# Altium PCB WiFi_Module-2-Layers.PcbDoc (part 2 of 2)
Units mil, origin at the board's own origin, x right, y up, seen from the top; angles counter-clockwise.
Board outline 2293.35 x 2499.67 mil, 2 copper layers (Top Layer, Bottom Layer); 66 components, 71 nets, 200 pads, 103 vias.
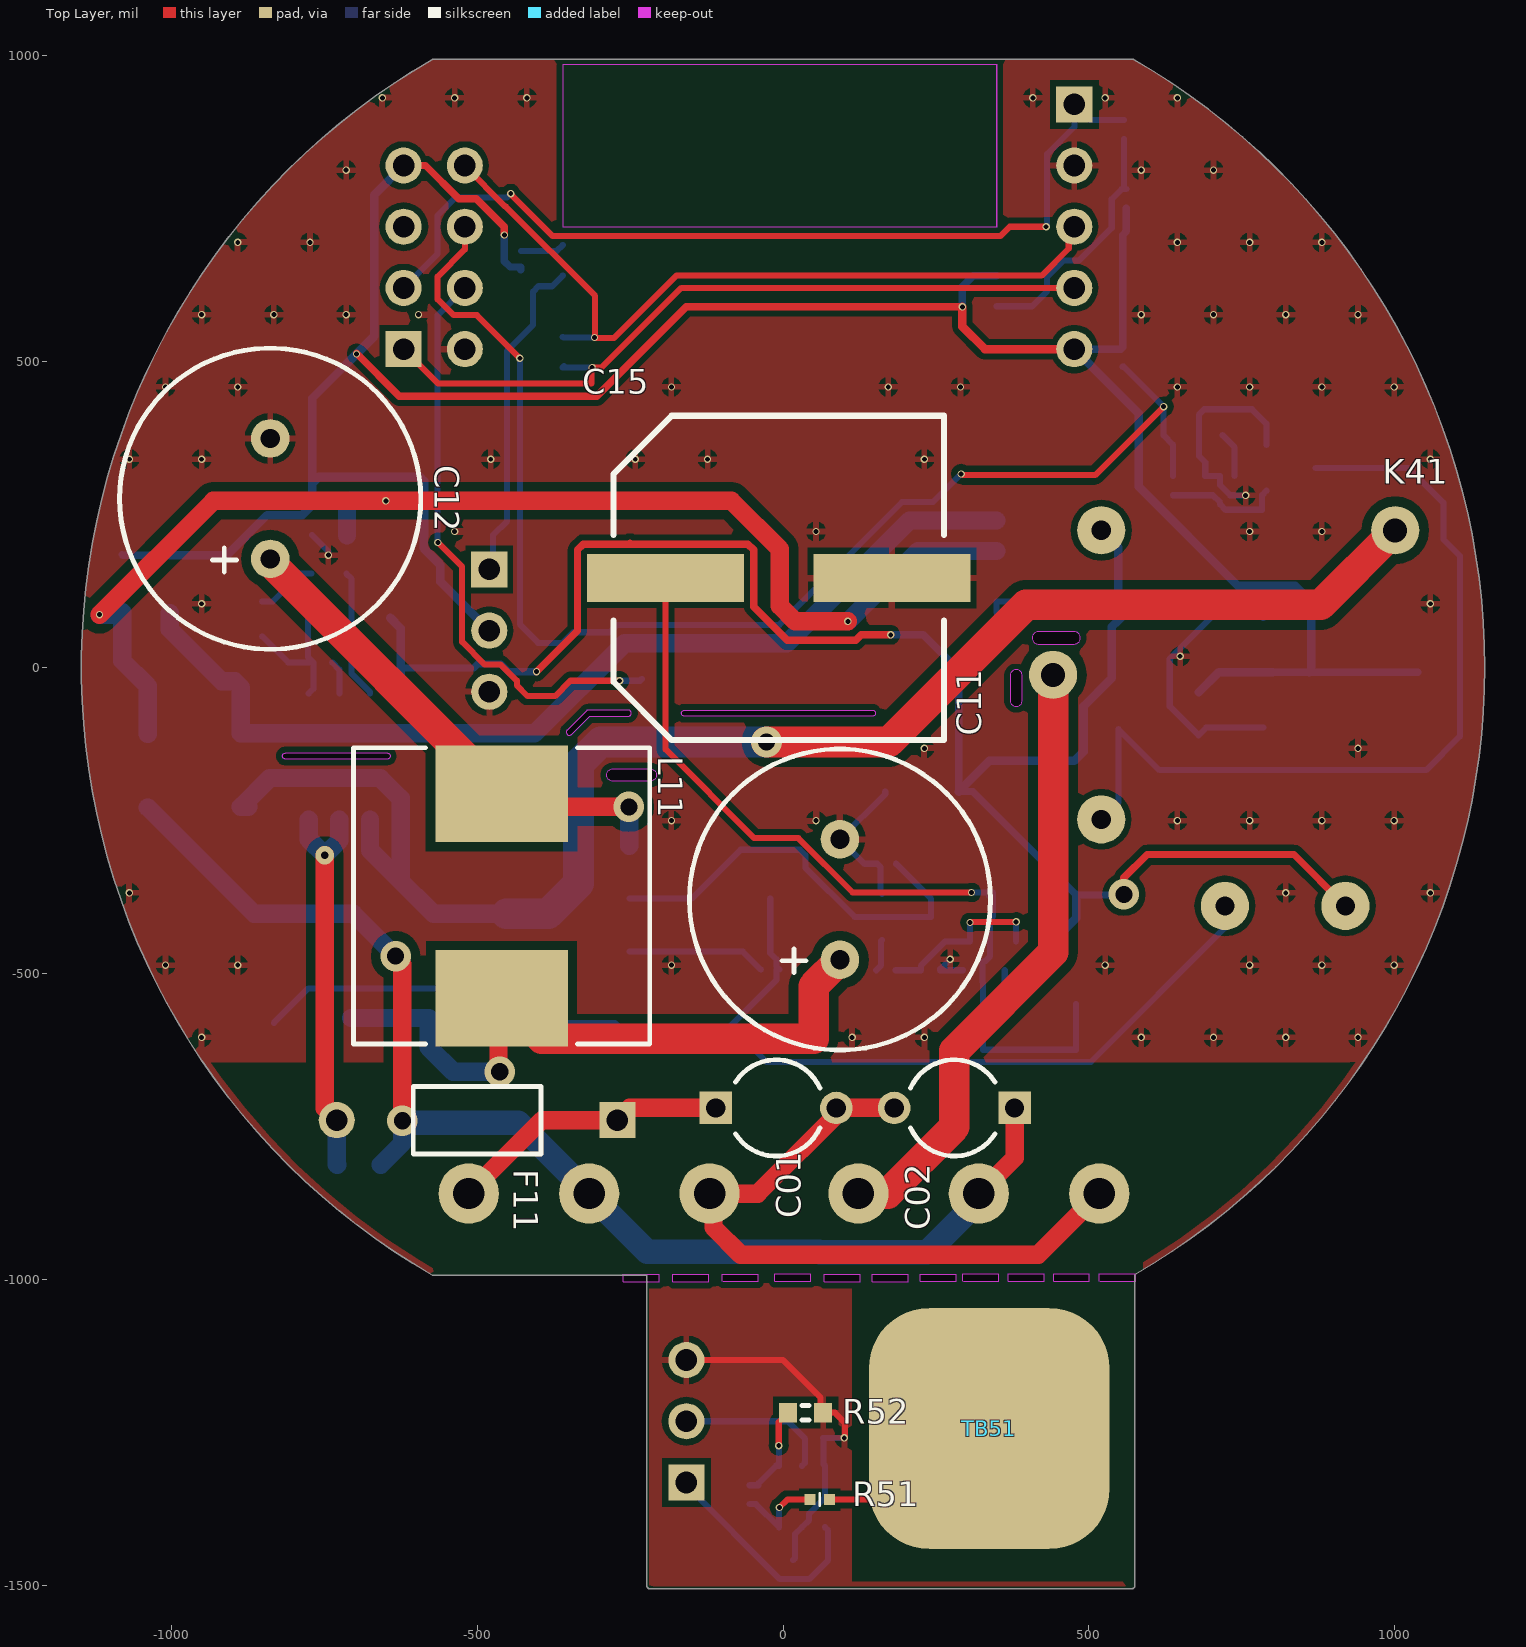
[diagram p0: Top Layer view]

## Via types
v1: diameter 12, hole 8, Top Layer to Bottom Layer, 96 vias
v2: diameter 50, hole 28, Top Layer to Bottom Layer, 6 vias
v3: diameter 30, hole 12, Top Layer to Bottom Layer, 1 vias

## Nets (pads, with @x,y where several pads share a name; then routed paths per layer and width w, separated by ;. In a path a pad name is that pad's centre, name@x,y a point inside that pad or via, vN(x,y) a via of type N, cw(c..) or ccw(c..) an arc to the next point about the centre after c; other vN are vias at no path point) (continued)
NetR53_2: (continued)
  Bottom Layer w10: P01.1 -158,-1337 -5,-1490 42.54,-1490 R53.2 73.54,-1410.34 U51.1
NetU12_4: 
NetU21_4: U21.4
NetU21_5: U21.5
NetU21_6: U21.6
NetU21_7: U21.7
NetU21_8: U21.8
NetU21_9: U21.9
NetU21_12: U21.12
NetU21_14: U21.14
NetU21_16: U21.16
NetU21_17: U21.17
NetU21_18: U21.18
NetU21_19: U21.19
NetU21_20: U21.20
NetU21_21: U21.21
NetU21_22: U21.22
NetU21_23: U21.23
NetU21_26: U21.26
NetU21_27: U21.27
NetU21_28: U21.28
NetU21_29: U21.29
NetU21_30: U21.30
NetU21_31: U21.31
NetU21_33: U21.33
NetU21_36: U21.36
RST: P22.5
RX: P21.4 P22.1 U21.34 | length 1248.1
  Top Layer w10: P22.1 -564,464 -313,464 -313,489 v1(-312,490) -296,490 -166,620 P21.4
  Bottom Layer w10: U21.34 -358,492 -356,490 v1(-312,490)
TouchBtn: P23.1 U21.37 | length 542.8
  Bottom Layer w10: P23.1 -474,166 -474,216 -451,239 -451,517 -408.46,559.54 -408.46,613.93 -399.68,622.72 -377.28,622.72 U21.37
TX: P21.3 P22.8 U21.35 | length 1297
  Top Layer w10: P22.8 -520,819.3 -453.7,753 -453,753 -307,607 -307,538 -276.28,538 -174.28,640 422.57,640 467,684.43 467,711 P21.3
  Bottom Layer w10: U21.35 -359,539 v1(-308,539)
pads on no net: U21.32

## Polygon pours and split planes (outlines as drawn)
GND on Bottom Layer "NONET_L-01_P-001" (solid, remove dead copper, pour order 22): -935.99,-645.01 ccw(c0,0) -568.36,-984.43 cw(c-570.87,-988.77) -565.85,-988.77 cw(c-570.87,-988.77) -573.37,-993.11 cw(c0,0) -948.26,-644.85 cw(c-947,-640) -951.97,-639.36 cw(c0,0) -573.37,993.11 cw(c-570.87,988.77) -570.87,993.78 570.87,993.78 cw(c570.87,988.77) 573.37,993.11 cw(c0,0) 1146.75,0 cw(c0,0) 953.29,-637.4 cw(c949,-640) 954.02,-640 cw(c949,-640) 949,-645.01 948.15,-645.01 cw(c0,0) 573.37,-993.11 cw(c570.87,-988.77) 568.36,-984.43 ccw(c0,0) 935.99,-645.01
no net on Bottom Layer "NONET_L-01_P-001" (solid, remove dead copper, pour order 8): 559,989
no net on Bottom Layer "NONET_L-01_P-001" (solid, remove dead copper, pour order 6): 1499,913
GND1 on Bottom Layer "NONET_L-01_P-001" (solid, remove dead copper, pour order 0): 570,-994 570,-1499 -218,-1499 -217,-1498 -217,-990 566,-990
GND on Top Layer "NONET_L-01_P-001" (solid, remove dead copper, pour order 24): -935.99,-645.01 ccw(c0,0) -568.36,-984.43 cw(c-570.87,-988.77) -565.85,-988.77 cw(c-570.87,-988.77) -573.37,-993.11 cw(c0,0) -948.26,-644.85 cw(c-947,-640) -951.97,-639.36 cw(c0,0) -573.37,993.11 cw(c-570.87,988.77) -570.87,993.78 570.87,993.78 cw(c570.87,988.77) 573.37,993.11 cw(c0,0) 1146.75,0 cw(c0,0) 953.29,-637.4 cw(c949,-640) 954.02,-640 cw(c949,-640) 949,-645.01 948.15,-645.01 cw(c0,0) 573.37,-993.11 cw(c570.87,-988.77) 568.36,-984.43 ccw(c0,0) 935.99,-645.01
GND1 on Top Layer "NONET_L-01_P-001" (solid, remove dead copper, pour order 4): 570,-991 568,-993 568,-1502 -219,-1502 -220,-1501 -219,-1500 -219,-989 570,-989
no net on Bottom Solder "NONET_L-01_P-001" (solid, remove dead copper): 570.87,988.77
no net on Bottom Solder "NONET_L-01_P-001" (none, remove dead copper): -573.37,-993.11 ccw(c-570.87,-988.77) -570.87,-993.78 -219.79,-993.78 ccw(c-217.54,-989.3) -217.54,-994.32 569.62,-994.32 ccw(c569.62,-989.3) 572.2,-993.6 ccw(c570.87,-988.77) 573.37,-993.11 ccw(c0,0) 1146.75,0 ccw(c0,0) 573.37,993.11 ccw(c570.87,988.77) 570.87,993.78 -570.87,993.78 ccw(c-570.87,988.77) -573.37,993.11 ccw(c0,0)

## Silkscreen, mask and mechanical layers (free items; w line width, h text height)
Bottom Overlay:
  text "UP" at 272,-1343 h100 r270
Bottom Solder:
  lines w10: -947,-640 949,-640 ; 569.62,-989.3 -217.54,-989.3 ; 569.87,-989.06 569.87,-1500.87 -217.54,-1500.87 -217.54,-989.3 ; 570.87,-988.77 ccw(c0,0) 570.87,988.77 -570.87,988.77 ccw(c0,0) -570.87,-988.77 -218.07,-988.77 -217.54,-989.3
Mechanical 17:
  lines w10: -813,-145 -647,-145 ; -349.16,-106 -318.16,-75 -253,-75 ; -161,-75 146,-75 ; 196,-901 196,-887.55
  lines w20: -278,-176 -217,-176 ; 381,-54 381,-14 ; 417,48 476,48

## Text inside footprints (layer, text, board x,y; h text height)
C11: Mechanical 17 "d" at 113,-649.57 h60 r90; Mechanical 19 "-" at 113,-649.57 h60 r90
C12: Mechanical 17 "d" at -818,5.57 h60 r90; Mechanical 19 "-" at -818,5.57 h60 r90
C13: Mechanical 17 "d" at 198.33,-323 h5.12; Mechanical 19 "-" at 198.33,-323 h5.12
C14: Mechanical 17 "d" at -49.84,-492 h5.12 r180; Mechanical 19 "-" at -49.84,-492 h5.12 r180
C15: Mechanical 17 "d" at -37,111 h60; Mechanical 19 "-" at -37,111 h60
C16: Mechanical 17 "d" at 287,-193 h20; Mechanical 19 "-" at 287,-233 h20
C17: Mechanical 17 "d" at 405,-536 h5.12; Mechanical 19 "-" at 405,-536 h5.12
C18: Mechanical 17 "d" at 702,126 h5.12 r90; Mechanical 19 "-" at 702,126 h5.12 r90
C19: Mechanical 17 "d" at 684,-31 h15 r90; Mechanical 19 "-" at 684,-31 h15 r90
C21: Mechanical 17 "d" at -430.35,636 h5.12 r270; Mechanical 19 "-" at -430.35,636 h5.12 r270
C22: Mechanical 17 "d" at 559,908 h5.12 r90; Mechanical 19 "-" at 559,908 h5.12 r90
C31: Mechanical 17 "d" at -621,76.65 h15; Mechanical 19 "-" at -621,76.65 h15
C32: Mechanical 17 "d" at -723,6 h5.12; Mechanical 19 "-" at -723,6 h5.12
C51: Mechanical 17 "d" at -57,-1381 h5.12 r270; Mechanical 19 "-" at -57,-1381 h5.12 r270
C52: Mechanical 17 "d" at 22,-1258 h5.12 r180; Mechanical 19 "-" at 22,-1258 h5.12 r180
D11: Mechanical 17 "d" at -619,-589 h15 r270; Mechanical 19 "-" at -619,-589 h15 r270
D12: Mechanical 17 "d" at -745.71,-589 h15 r270; Mechanical 19 "-" at -745.71,-589 h15 r270
D13: Mechanical 17 "d" at -412,-387 h15 r90; Mechanical 19 "-" at -412,-387 h15 r90
D14: Mechanical 17 "d" at -792,-387 h15 r90; Mechanical 19 "-" at -792,-387 h15 r90
D15: Mechanical 17 "d" at -76,-626 h15; Mechanical 19 "-" at -76,-626 h15
D16: Mechanical 17 "d" at 393,-413 h20; Mechanical 19 "-" at 393,-413 h20
D17: Mechanical 17 "d" at 439,-566 h15 r270; Mechanical 19 "-" at 439,-566 h15 r270
D21: Mechanical 17 "d" at 705,374.25 h10; Mechanical 19 "-" at 705,374.25 h10
D31: Mechanical 17 "d" at -1017,106 h10 r270; Mechanical 19 "-" at -1017,106 h10 r270
D32: Mechanical 17 "d" at -1095,107 h10 r270; Mechanical 19 "-" at -1095,107 h10 r270
D41: Mechanical 17 "d" at 588,93 h15 r90; Mechanical 19 "-" at 588,93 h15 r90
J01: Mechanical 17 "d" at -585.28,-850 h40 r180; Mechanical 19 "-" at -585.28,-850 h40 r180
J02: Mechanical 17 "d" at 51.57,-850 h40 r180; Mechanical 19 "-" at 51.57,-850 h40 r180
P22: Bottom Overlay "8" at -540,880 h50 r270; Bottom Overlay "7" at -640,880 h50 r270; Bottom Overlay "1" at -640,440 h50 r270; Bottom Overlay "2" at -540,420 h50 r270
P23: Mechanical 17 "d" at -450,205 h60 r90; Mechanical 19 "-" at -450,205 h60 r90
Q11: Mechanical 17 "d" at 197,-458 h20 r270; Mechanical 19 "-" at 197,-458 h20 r270
Q41: Mechanical 17 "d" at 842,276 h20 r270; Mechanical 19 "-" at 842,276 h20 r270
R12: Mechanical 17 "d" at 136.87,-492.08 h5.12 r180; Mechanical 19 "-" at 137,-492 h5.12 r180
R13: Mechanical 17 "d" at 272.13,-497.92 h5.12; Mechanical 19 "-" at 272,-498 h5.12
R14: Mechanical 17 "d" at 278.87,-492.08 h5.12 r180; Mechanical 19 "-" at 279,-492 h5.12 r180
R15: Mechanical 17 "d" at 409.13,-497.92 h5.12; Mechanical 19 "-" at 409,-498 h5.12
R21: Mechanical 17 "d" at 735.08,265.87 h5.12 r270; Mechanical 19 "-" at 735,266 h5.12 r270
R22: Mechanical 17 "d" at 563.92,796.88 h5.12 r90; Mechanical 19 "-" at 564,796.75 h5.12 r90
R23: Mechanical 17 "d" at 552.08,475.87 h5.12 r270; Mechanical 19 "-" at 552,476 h5.12 r270
R31: Mechanical 17 "d" at -929,-239 h15 r270; Mechanical 19 "-" at -929,-239 h15 r270
R32: Mechanical 17 "d" at -1081,-240 h15 r270; Mechanical 19 "-" at -1081,-240 h15 r270
R33: Mechanical 17 "d" at -1028,2 h10 r180; Mechanical 19 "-" at -1028,2 h10 r180
R34: Mechanical 17 "d" at -771,211 h10 r180; Mechanical 19 "-" at -771,231 h10 r180
R35: Mechanical 17 "d" at -711,270 h10; Mechanical 19 "-" at -711,250 h10
R36: Mechanical 17 "d" at -712,158 h10; Mechanical 19 "-" at -712,138 h10
R37: Mechanical 17 "d" at -846,49 h10 r270; Mechanical 19 "-" at -866,49 h10 r270
R41: Mechanical 17 "d" at 639.92,328.13 h5.12 r90; Mechanical 19 "-" at 640,328 h5.12 r90
R42: Mechanical 17 "d" at 692.92,328.13 h5.12 r90; Mechanical 19 "-" at 693,328 h5.12 r90
R51: Mechanical 17 "d" at 91.13,-1357.08 h5.12 r180; Mechanical 19 "-" at 91,-1357 h5.12 r180
R52: Mechanical 17 "d" at 67,-1223 h10 r180; Mechanical 19 "-" at 67,-1203 h10 r180
R53: Mechanical 17 "d" at 15,-1464 h10 r180; Mechanical 19 "-" at 15,-1444 h10 r180
U12: Mechanical 17 "d" at 906,-123 h25 r270; Mechanical 19 "-" at 906,-123 h25 r270